# EAGLE board Controller (EAGLE 7.2.0)
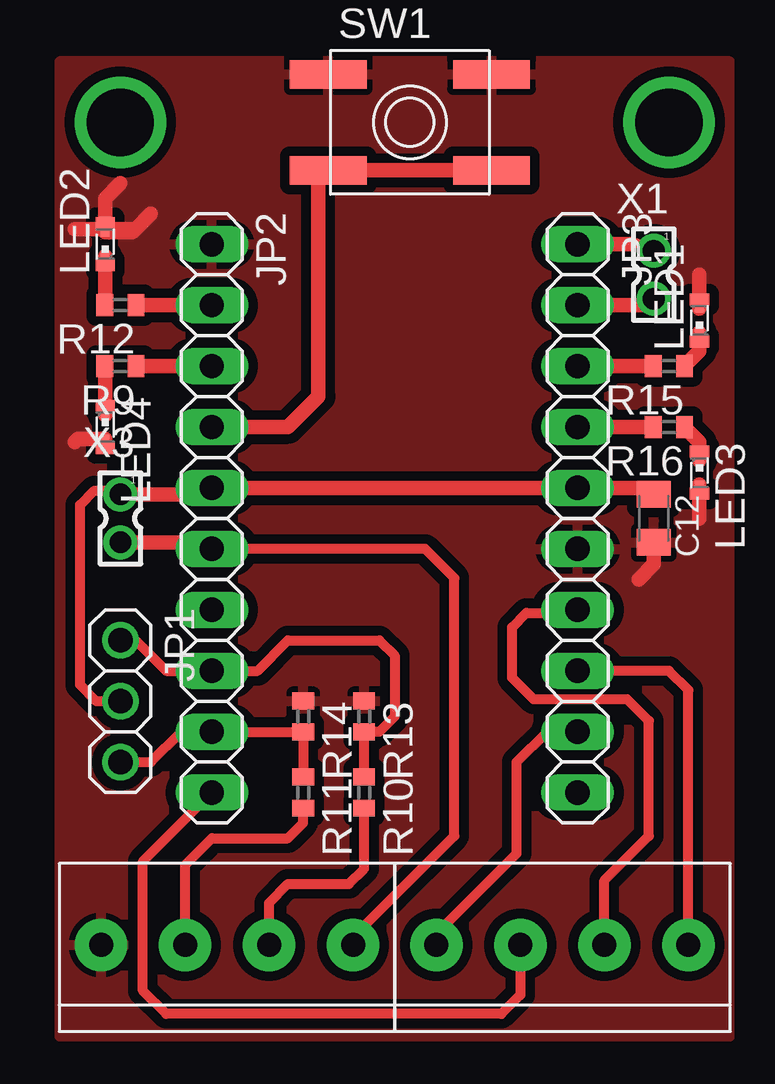
[diagram p0: board, top side]

No outline drawn. Coordinates in mm, seen from the top.
Copper layers (1*16): Top 0.035mm / dielectric 1.5mm / Bottom 0.035mm
Design rules "default": minimum track width 10mil, minimum drill 24mil, track to track 8mil, track to pad 8mil, pad to pad 8mil, via to via 8mil, smd to smd 8mil, copper to edge 40mil, drill to drill 8mil, minimum pad ring 10mil, minimum via ring 8mil, stop-mask expansion 4mil, vias tented up to drill 0mil, thermal gap 10mil

## Footprints (pad centres in the part's own frame; a part is rotated, then mirrored left to right if it is on the bottom)
C0805K = smd 1.1 x 1.4: 1 -1,0; 2 1,0
1X04-3.5MM = drill 1 pad 2.184: 1 -5.25,0; 2 -1.75,0; 3 1.75,0; 4 5.25,0
1X03 = drill 1.016: 1 -2.54,0; 2 0,0; 3 2.54,0
1X10 = drill 1.016 long: 1 -11.43,0; 2 -8.89,0; 3 -6.35,0; 4 -3.81,0; 5 -1.27,0; 6 1.27,0; 7 3.81,0; 8 6.35,0; 9 8.89,0; 10 11.43,0
SMARTLED-TTW = smd 0.8 x 0.5: A 0,-0.875; C 0,0.875 | smd 0.35 x 0.35: A@1 0,-0.5; C@1 0,0.5
R1005 = smd 0.7 x 0.9: 1 -0.65,0; 2 0.65,0
EVQ-Q2 = smd 3.2 x 1.2: A -3.4,-2; A' 3.4,-2; B -3.4,2; B' 3.4,2
332-02 = drill 0.9 pad 1.27: 1 0,-1; 2 0,1

## Placement (x,y rotation side)
C12  0.1u  [C0805K]  52.7,27.94 270 top
CN1  1X4-3.5MM  [1X04-3.5MM]  34.92,10.16 0 top
CN2  1X4-3.5MM  [1X04-3.5MM]  48.9,10.16 0 top
JP1  [1X03]  30.48,20.32 270 top
JP2  [1X10]  34.29,27.94 270 top
JP3  [1X10]  49.53,27.94 270 top
LED1  [SMARTLED-TTW]  54.61,36.2 0 top
LED2  [SMARTLED-TTW]  29.84,39.37 0 top
LED3  [SMARTLED-TTW]  54.61,29.84 180 top
LED4  [SMARTLED-TTW]  29.84,31.75 180 top
R9  68R  [R1005]  30.48,34.29 180 top
R10  3.3R3  [R1005]  40.64,16.51 270 top
R11  3.3R3  [R1005]  38.1,16.51 270 top
R12  68R  [R1005]  30.48,36.83 180 top
R13  6.8R3  [R1005]  40.64,19.68 270 top
R14  6.8R3  [R1005]  38.1,19.68 270 top
R15  68R  [R1005]  53.34,34.29 180 top
R16  68R  [R1005]  53.34,31.75 180 top
SW1  SPST_TACT-EVQQ2  [EVQ-Q2]  42.55,44.45 0 top
X1  332-02  [332-02]  52.7,38.1 180 top
X3  332-02  [332-02]  30.48,27.94 180 top

## Library data of the parts
C12 CN1 CN2 JP1 LED1-LED4 R9-R16 SW1 = adafruit
JP2 JP3 = pinhead
X1 X3 = con-garry

## Nets
3.3V: C12.1 JP1.2 JP2.5 JP3.5 X3.1
ADCIN: CN1.4 JP2.6 X3.2
DIRECTION: CN1.3 R10.2
ENABLE: CN1.2 R11.2
GND: C12.2 CN1.1 JP2.1 JP3.6 LED1.C@1 LED2.C@1 LED3.C@1 LED4.C@1 R13.1 R14.1 SW1.B SW1.B'
GPIO: JP3.10
H1IN: CN2.1 JP3.9
H2IN: CN2.3 JP3.7
ICURRENT: JP2.7
L1IN: CN2.2 JP2.10
L2IN: CN2.4 JP3.8
LED1+: JP2.2 R12.1
LED1-: JP2.3 R9.1
LED2+: JP3.3 R15.2
LED2-: JP3.4 R16.2
N$4: JP2.4 SW1.A SW1.A'
N$5: LED1.A@1 R15.1
N$6: LED3.A@1 R16.1
N$16: LED2.A@1 R12.2
N$17: LED4.A@1 R9.2
NO1: JP1.3 JP2.9 R11.1 R14.2
NO2: JP1.1 JP2.8 R10.1 R13.2
SYS-CLK: JP3.1 X1.1
SYS-DIO: JP3.2 X1.2

## Tracks (layer width: path | path; a pad name or v marks a point on that pad's centre or on a via)
3.3V
  Top 0.406: JP1.2 29.48,20.32 28.8,21 28.8,28.5 29.4,29.1 30.32,29.1 X3.1
  Top 0.61: C12.1 52.44,29.21 JP3.5 JP2.5 34.02,28.94 X3.1
ADCIN
  Top 0.406: CN1.4 40.46,10.76 44.4,14.7 44.4,25.45 43.18,26.67 JP2.6
  Top 0.61: X3.2 34.02,26.94 JP2.6
DIRECTION
  Top 0.406: CN1.3 36.67,11.91 37.47,12.7 40.01,12.7 40.64,13.34 R10.2
ENABLE
  Top 0.406: CN1.2 33.17,13.49 34.29,14.61 37.47,14.61 38.1,15.24 R11.2
GND
  Top 0.61: 54.61,38.1 LED1.C@1 | LED3.C@1 54.61,27.94 | C12.2 52.7,26.04 52.07,25.4 | 30.48,41.91 29.84,41.27 LED2.C@1 30.98,39.87 31.11,40.01 | 31.75,40.64 31.11,40.01 | 31.11,40.01 28.57,40.01 | LED4.C@1 28.71,31.25 28.57,31.11
  pour Top (isolate 0.406): 27.94,6.35 55.88,6.35 55.88,46.99 27.94,46.99
H1IN
  Top 0.406: CN2.1 43.65,10.62 46.99,13.97 46.99,17.78 48.26,19.05 JP3.9
H2IN
  Top 0.406: CN2.3 50.65,12.85 52.5,14.7 52.5,19.5 51.6,20.4 47.7,20.4 46.8,21.3 46.8,23.4 47.4,24 49.4,24 JP3.7
L1IN
  Top 0.406: CN2.2 47.15,8.07 46.35,7.29 32.38,7.29 31.41,8.26 31.41,13.63 JP2.10
L2IN
  Top 0.406: CN2.4 54.15,20.79 53.34,21.59 JP3.8
LED1+
  Top 0.61: R12.1 JP2.2
LED1-
  Top 0.61: R9.1 JP2.3
LED2+
  Top 0.61: JP3.3 R15.2
LED2-
  Top 0.61: R16.2 JP3.4
N$1  (via drill 2.8)
  other vias: 30.48,44.45
N$2  (via drill 2.8)
  other vias: 53.34,44.45
N$4
  Top 0.61: JP2.4 37.47,31.75 38.73,33.02 38.73,42.04 SW1.A SW1.A'
N$5
  Top 0.61: R15.1 53.99,34.3 54.61,34.92 LED1.A@1
N$6
  Top 0.61: R16.1 53.99,31.73 54.61,31.11 LED3.A@1
N$16
  Top 0.61: LED2.A@1 29.84,36.84 R12.2
N$17
  Top 0.61: LED4.A@1 29.84,34.27 R9.2
NO1
  Top 0.406: JP1.3 31.75,17.78 33.02,19.05 JP2.9 38.09,19.05 | R14.2 R11.1
  Top 0.61: 38.09,19.05 R14.2
NO2
  Top 0.406: JP1.1 31.11,22.86 32.38,21.59 JP2.8 36.2,21.59 37.47,22.86 41.27,22.86 41.91,22.23 41.91,19.68 41.27,19.05 40.62,19.05 | R10.1 R13.2
  Top 0.61: 40.62,19.05 R13.2
SYS-CLK
  Top 0.61: JP3.1 51.8,39.37 X1.1
SYS-DIO
  Top 0.61: JP3.2 52.44,36.83 X1.2